# EAGLE board SNAC  7ch SNES in Housing (EAGLE 9.0.1)
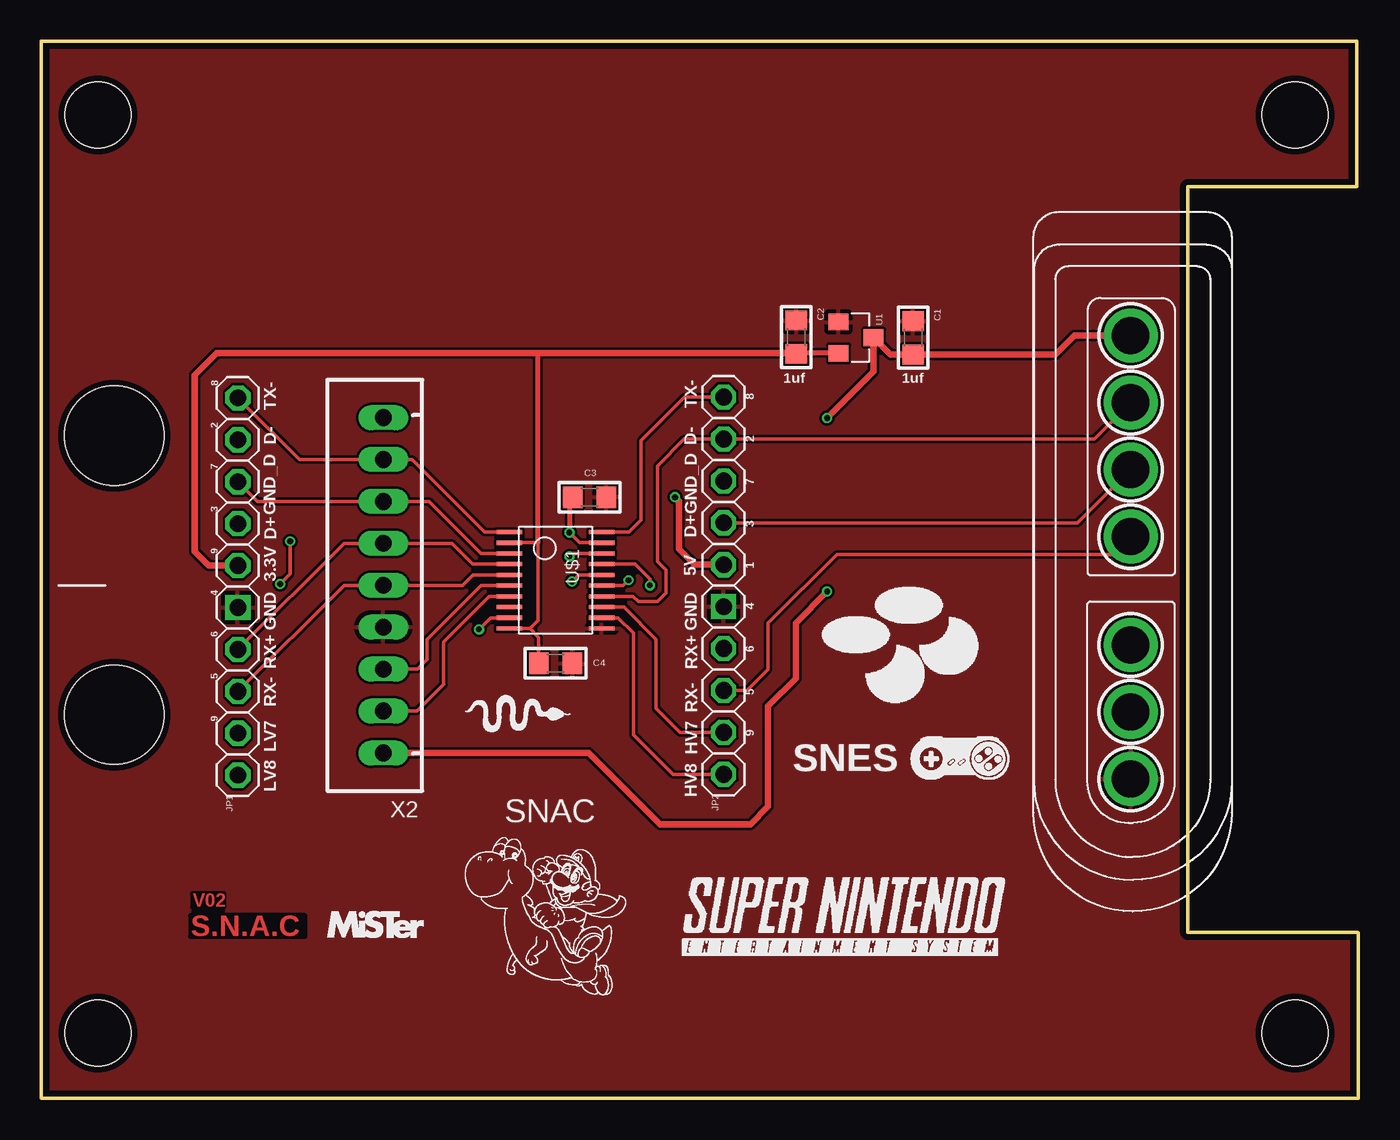
[diagram p0: board, top side]
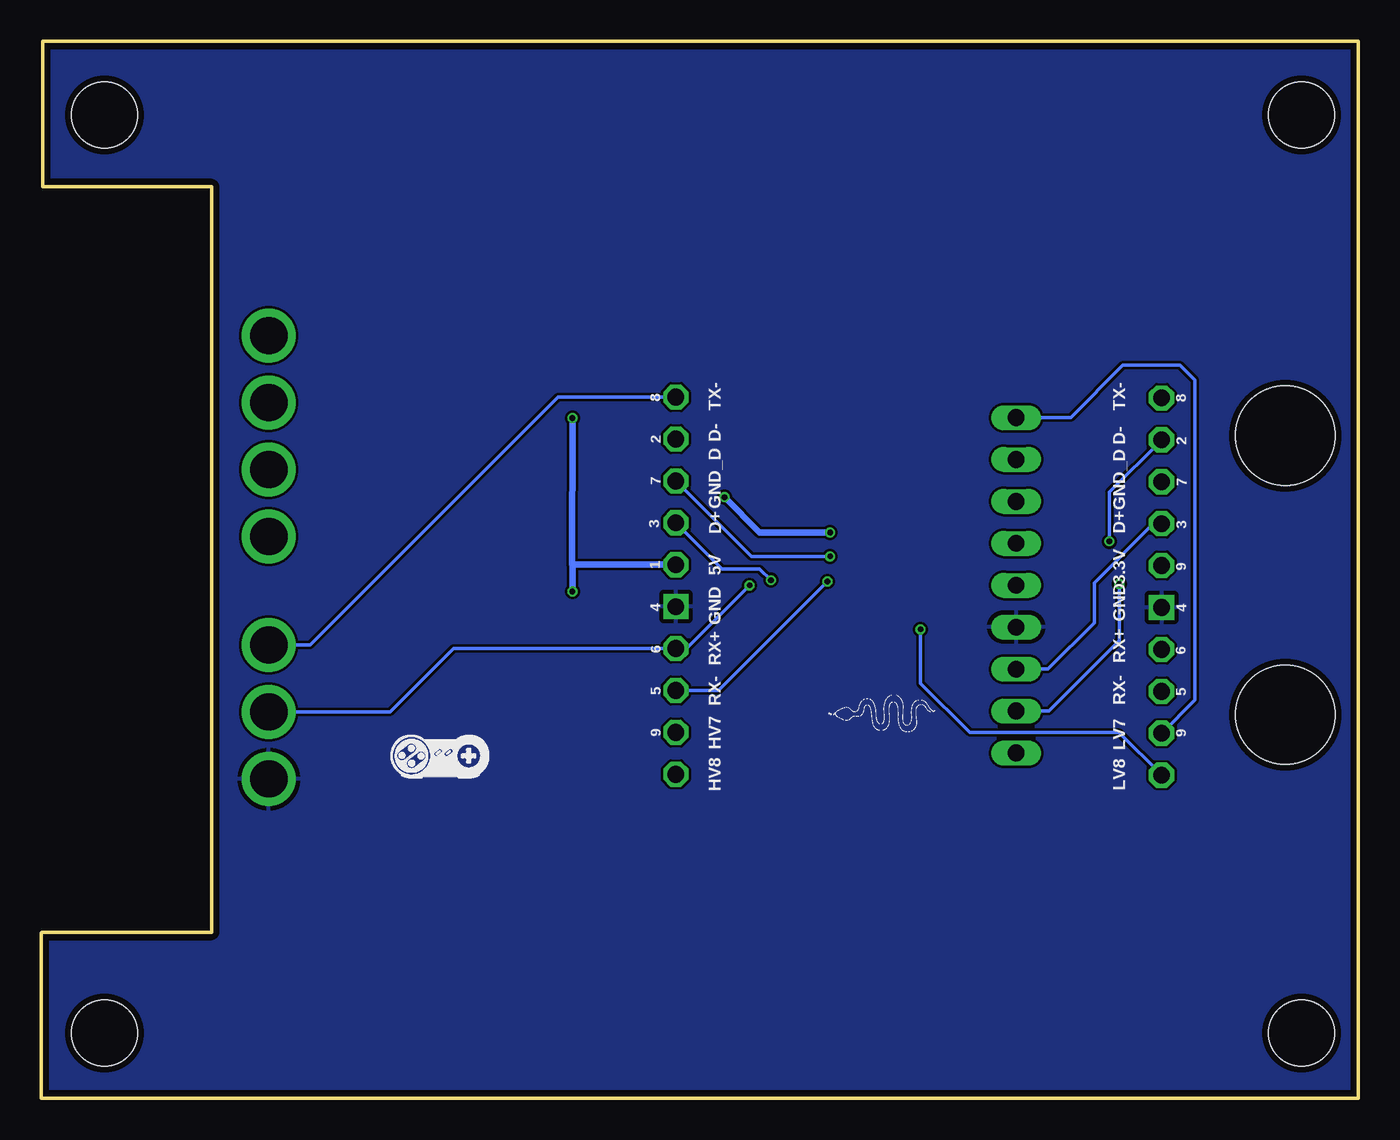
[diagram p1: board, bottom side, seen from below]

Size 79.81 x 64.06 mm. Coordinates in mm from the lower left corner, seen from the top.
Outline: 0,64.06 0,0 79.81,0 79.81,10.03 79.78,10.06 69.49,10.06 69.49,55.24 79.7,55.24 79.7,64.06 0,64.06
Copper layers (1*16): Top 0.035559375mm / dielectric 1.6mm / Bottom 0.035559375mm
Design rules "oshpark-2layer": minimum track width 6mil, minimum drill 10mil, track to track 6mil, track to pad 6mil, pad to pad 6mil, via to via 6mil, smd to smd 6mil, copper to edge 15mil, drill to drill 6mil, minimum pad ring 5mil, minimum via ring 5mil, stop-mask expansion 2.5mil, vias tented up to drill 0mil, thermal gap 10mil
Holes 4 mm at 3.43,59.59 75.97,59.59 3.43,3.96 75.97,3.96
Holes 6 mm at 4.42,40.16 4.42,23.24

## Footprints (pad centres in the part's own frame; a part is rotated, then mirrored left to right if it is on the bottom)
C0805 = smd 1.2 x 1.3: 1 -1.016,0; 2 1.016,0
1X10-S = drill 1.016 octagon: 1 -11.43,0; 2 -8.89,0; 3 -6.35,0; 4 -3.81,0; 5 -1.27,0; 7 3.81,0; 8 6.35,0; 9 8.89,0; 10 11.43,0 | drill 1.016 square: 6 1.27,0
SOT-23 = smd 1.016 x 1.2: 1 -0.95,-1.06; 2 0.95,-1.06; 3 0,1.06
R-PUSON-N20 = smd 0.25 x 1.55: 1 -2.925,-2.8; 2 -2.275,-2.8; 3 -1.625,-2.8; 4 -0.975,-2.8; 5 -0.325,-2.8; 6 0.325,-2.8; 7 0.975,-2.8; 8 1.625,-2.8; 9 2.275,-2.8; 10 2.925,-2.8; 11 2.925,2.8; 12 2.275,2.8; 13 1.625,2.8; 14 0.975,2.8; 15 0.325,2.8; 16 -0.325,2.8; 17 -0.975,2.8; 18 -1.625,2.8; 19 -2.275,2.8; 20 -2.925,2.8
SNESCONN = drill 2.25 pad 3.25: 5V 0,4.064; CLOCK 4.064,4.064; D0 12.192,4.064; D1 18.756,4.064; GND 26.884,4.064; IO 22.82,4.064; LATCH 8.128,4.064
JST-XH-09-PACKAGE-LONG-PAD = drill 1.016 long: 1 -10.16,0; 2 -7.62,0; 3 -5.08,0; 4 -2.54,0; 5 0,0; 6 2.54,0; 7 5.08,0; 8 7.62,0; 9 10.16,0

## Placement (x,y rotation side)
C1  1uf  [C0805]  52.83,46.09 270 top
C2  1uf  [C0805]  45.76,46.13 270 top
C3  100nF  [C0805]  33.22,36.42 180 top
C4  100nF  [C0805]  31.17,26.37 180 top
JP1  PINHD-1X10_2.54-S  [1X10-S]  11.91,31.01 270 top
JP2  PINHD-1X10_2.54-S  [1X10-S]  41.35,31.06 270 top
U1  PMIC-LDO-XC6206P332MR-G(SOT23)  [SOT-23]  49.38,46.1 270 top
U$1  TXS0108  [R-PUSON-N20]  31.17,31.39 270 top
U$3  SNESCONN  [SNESCONN]  61.95,46.23 270 top
X2  JST-XH-09-PIN-LONG-PAD  [JST-XH-09-PACKAGE-LONG-PAD]  20.73,31.09 90 top

## Library data of the parts
C1-C4 = rc-master-smd
JP1 JP2 = pinhead-2
U1 = PMIC-LDO-XC6206P332MR-G_SOT23_; AVAILABILITY: Unavailable; DESCRIPTION: SMD PMIC; LDO; Vin 6V; 3.3V; 200mA; Without En; 1-Ch; MF: Torex; MP: XC6206P332MR-G; PACKAGE: SOT-23-3 Torex; PRICE: None
U$1 = FaBo-LevelTranslator
U$3 = gamepad-conn
X2 = Rembrandt Electronics - JST XH Connectors v1-0

## Nets
GND: C1.1 C2.1 C3.1 C4.1 JP1.6 JP2.6 U1.1 U$1.11 U$3.GND X2.4
HV: C1.2 C3.2 JP2.5 U1.3 U$1.19 U$3.5V X2.1
HV1: JP2.1 U$1.20 U$3.D1
HV2: JP2.2 U$1.14 U$3.CLOCK
HV3: JP2.3 U$1.18
HV4: JP2.4 U$1.15 U$3.LATCH
HV5: JP2.7 U$1.17 U$3.IO
HV6: JP2.8 U$1.16 U$3.D0
HV7: JP2.9 U$1.13
HV8: JP2.10 U$1.12
LV: C2.2 C4.2 JP1.5 U1.2 U$1.2 U$1.10
LV1: JP1.1 U$1.1 X2.8
LV2: JP1.2 U$1.7 X2.2
LV3: JP1.3 U$1.3 X2.7
LV4: JP1.4 U$1.6 X2.3
LV5: JP1.7 U$1.4 X2.6
LV6: JP1.8 U$1.5 X2.5
LV7: JP1.9 X2.9
LV8: JP1.10 U$1.9
N$6: U$1.8

## Tracks (layer width: path | path; a pad name or v marks a point on that pad's centre or on a via)
GND
  pour Top: 79.58,64.01 79.63,64.01 79.71,55.24 69.49,55.24 69.49,10.06 79.78,10.06 79.78,0.03 0.03,0.05 0.08,63.98
  pour Bottom: 79.63,64.01 79.71,55.24 69.49,55.24 69.49,10.06 79.78,10.06 79.78,-0.03 0.03,0.05 0.08,64.01
HV  (via drill 0.35)
  Top 0.203: v32,34.29 32.62,33.67 U$1.19
  Top 0.305: C3.2 32,36.22 v32,34.29
  Top 0.406: U1.3 51.46,45.07 C1.2 61.46,45.07 62.61,46.23 U$3.5V | 50.29,45.96 U1.3 | v47.62,30.71 45.72,28.8 45.72,25.45 44.04,23.77 44.04,17.68 42.98,16.61 37.49,16.61 33.17,20.93 X2.1 | JP2.5 39.6,32.33 38.63,33.3 38.63,36.19 v38.4,36.42 | v47.62,41.22 50.44,44.04 U1.3
  Bottom 0.406: JP2.5 47.65,32.33 | 47.65,32.33 v47.62,41.22 | v47.62,30.71 47.62,32.31 47.65,32.33 | v38.4,36.42 36.27,34.29 v32,34.29
HV1
  Top 0.203: JP2.1 38.99,42.49 36.35,39.85 36.35,35.05 35.61,34.32 U$1.20
  Bottom 0.203: U$3.D1 63.51,27.47 48.49,42.49 JP2.1
HV2
  Top 0.203: U$3.CLOCK 63.8,39.95 JP2.2 38.96,39.95 37.34,38.33 37.34,32.54 37.87,32 37.87,30.63 37.34,30.1 36.19,30.1 35.87,30.42 U$1.14
HV3  (via drill 0.35)
  Top 0.203: v32,32.84 32.18,33.02 U$1.18
  Bottom 0.203: v32,32.84 36.78,32.84 JP2.3
HV4  (via drill 0.35)
  Top 0.203: JP2.4 62.79,34.87 U$3.LATCH | U$1.15 35.26,31.07 v35.59,31.39
  Bottom 0.203: v35.59,31.39 36.27,32.08 38.56,32.08 JP2.4
HV5  (via drill 0.35)
  Top 0.203: U$1.17 35.98,32.37 36.88,31.47 v36.88,31.09
  Bottom 0.203: U$3.IO 58.66,23.41 54.81,27.25 JP2.7 40.72,27.25 v36.88,31.09
HV6  (via drill 0.35)
  Top 0.203: JP2.8 42.77,24.71 44.04,25.98 44.04,28.8 48.21,32.97 64.95,32.97 U$3.D0 | v32.16,31.32 32.56,31.72 U$1.16
  Bottom 0.203: v32.16,31.32 38.76,24.71 JP2.8
HV7
  Top 0.203: JP2.9 38.71,22.17 37.26,23.62 37.26,27.81 35.31,29.77 U$1.13
HV8
  Top 0.203: JP2.10 38.28,19.63 35.89,22.02 35.89,28.19 34.96,29.12 U$1.12
LV
  Top 0.203: 29.61,28.47 30.1,28.96 30.1,33.68 30.09,33.67 U$1.2 | C4.2 30.15,27.93 29.61,28.47 | U$1.10 29.61,28.47
  Top 0.305: U1.2 45.8,45.15 C2.2 | 30.1,33.68 30.1,45.15
  Top 0.406: JP1.5 10.16,32.28 9.3,33.15 9.3,43.81 10.63,45.15 30.1,45.15 45.8,45.15
LV1
  Top 0.203: JP1.1 15.65,38.71 X2.8 22.48,38.71 26.87,34.32 U$1.1
LV2  (via drill 0.35)
  Top 0.203: v15.09,33.76 15.09,31.78 v14.48,31.17 | X2.2 22.78,23.47 24.38,25.07 24.38,27.66 27.14,30.42 U$1.7
  Bottom 0.203: JP1.2 15.09,36.73 v15.09,33.76 | X2.2 18.74,23.47 14.48,27.74 v14.48,31.17
LV3
  Top 0.203: JP1.3 13.11,36.17 X2.7 23.49,36.17 26.64,33.02 U$1.3
LV4
  Top 0.203: X2.3 22.81,26.01 23.39,26.59 23.39,27.81 26.65,31.07 U$1.6
  Bottom 0.203: JP1.4 12.42,34.82 16,31.24 16,28.8 18.8,26.01 X2.3
LV5
  Top 0.203: JP1.7 18.34,33.63 X2.6 24.89,33.63 26.15,32.37 U$1.4
LV6
  Top 0.203: 20.75,31.07 X2.5 | JP1.8 18.34,31.09 X2.5 | X2.5 25.53,31.09 26.16,31.72 U$1.5
LV7
  Bottom 0.2: 9.91,43.51 10.82,44.42 14.25,44.42 17.42,41.25 X2.9
  Bottom 0.203: JP1.9 9.91,24.13 9.91,43.51
LV8  (via drill 0.35)
  Top 0.203: v26.52,28.42 27.21,29.12 U$1.9
  Bottom 0.203: JP1.10 14.5,22.17 23.55,22.17 26.52,25.15 v26.52,28.42

## Text on the board
Top: V02 | S.N.A.C
tPlace: 8 | TX- | TX- | 1uf | 1uf | 8 | 2 | D- | D- | 2 | GND_D | GND_D | 7 | 7 | 3 | D+ | D+ | 3 | 9 | 3.3V | 5V | 1 | 4 | GND | GND | 4 | 6 | RX+ | 6 | RX+ | 5 | RX- | 5 | 9 | RX- | LV7 | 9 | LV8 | HV7 | SNES | HV8 | SNAC
bPlace: 8 | 8 | TX- | TX- | 2 | D- | D- | 2 | 7 | 7 | GND_D | GND_D | 3 | D+ | D+ | 3 | 9 | 1 | 3.3V | 5V | 4 | 4 | GND | GND | 6 | 6 | RX+ | RX+ | 5 | 5 | RX- | RX- | 9 | LV7 | HV7 | 9 | LV8 | HV8
tValues: + | - | + | -